# Altium PCB MicArrayPCBBoard_V3.PcbDoc (part 1 of 2)
Units mm, origin at the board's own origin, x right, y up, seen from the top; angles counter-clockwise.
Board outline 272 x 42 mm, 4 copper layers (Top Layer (ANLG1), Mid-Layer1 (GND), Mid-Layer2 (DIG), Bottom Layer (ANLG2)); 140 components, 65 nets, 451 pads, 100 vias.
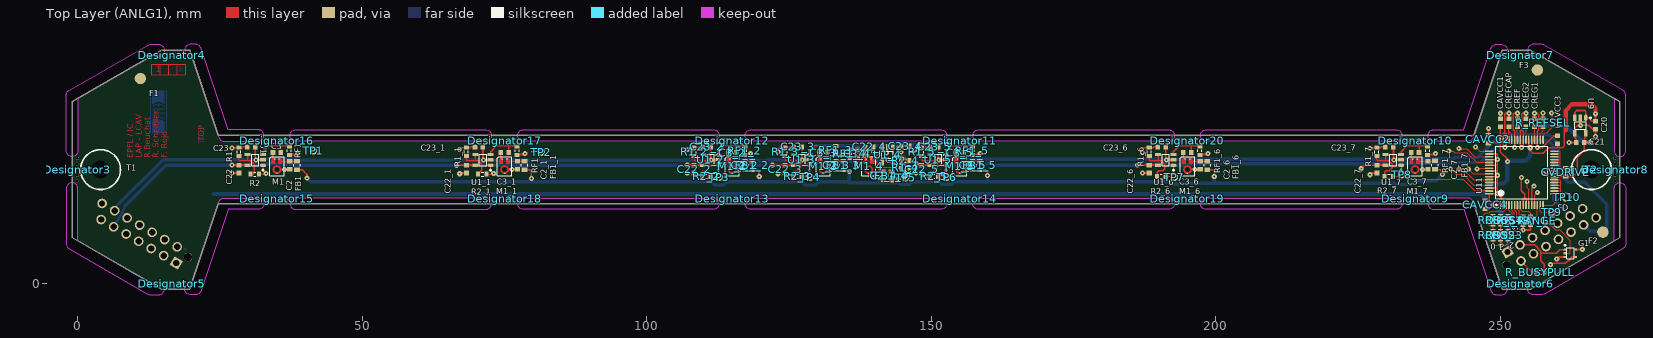
[diagram p0: Top Layer (ANLG1) view]
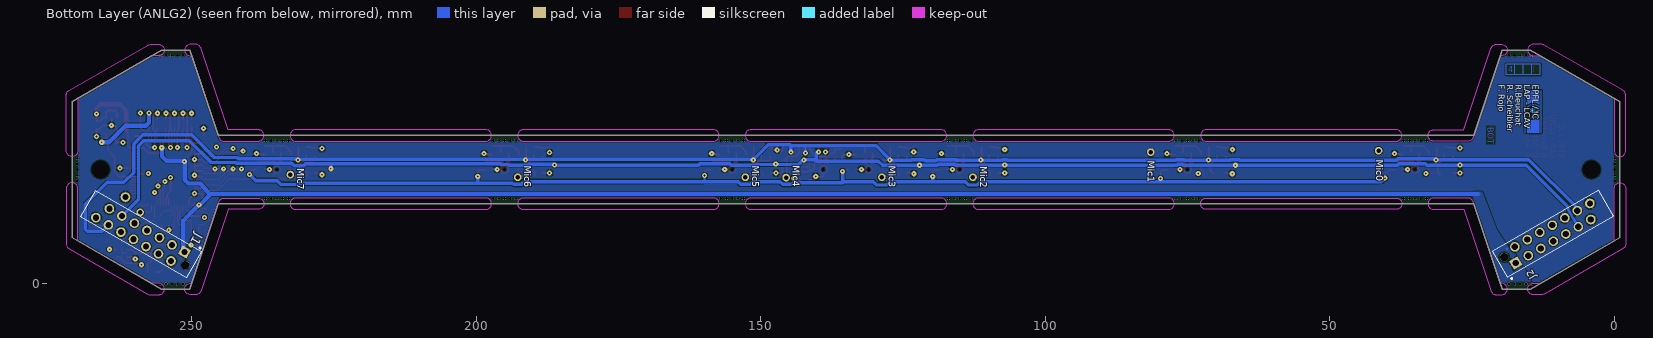
[diagram p1: Bottom Layer (ANLG2) view, seen from below]
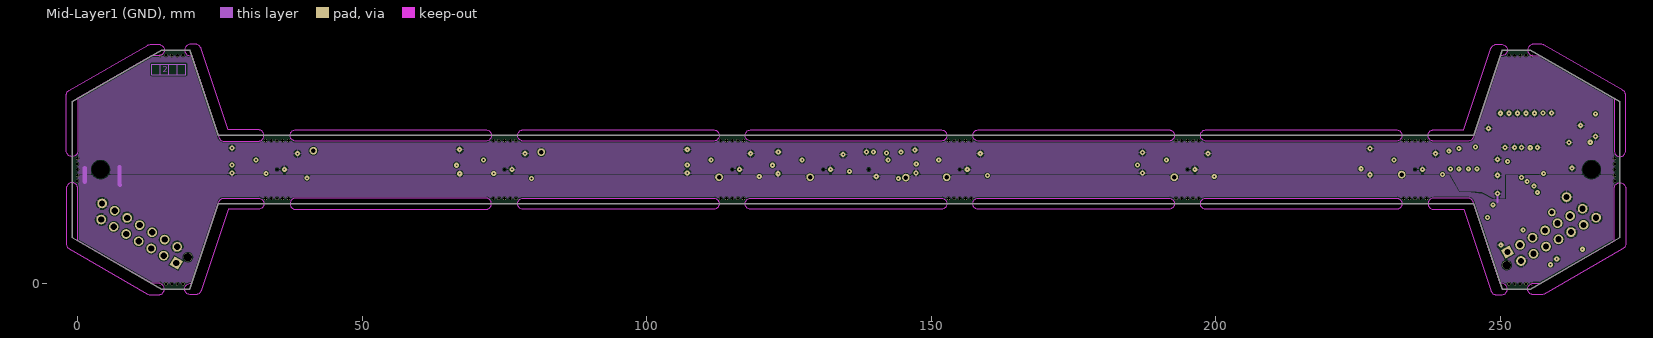
[diagram p2: Mid-Layer1 (GND)]
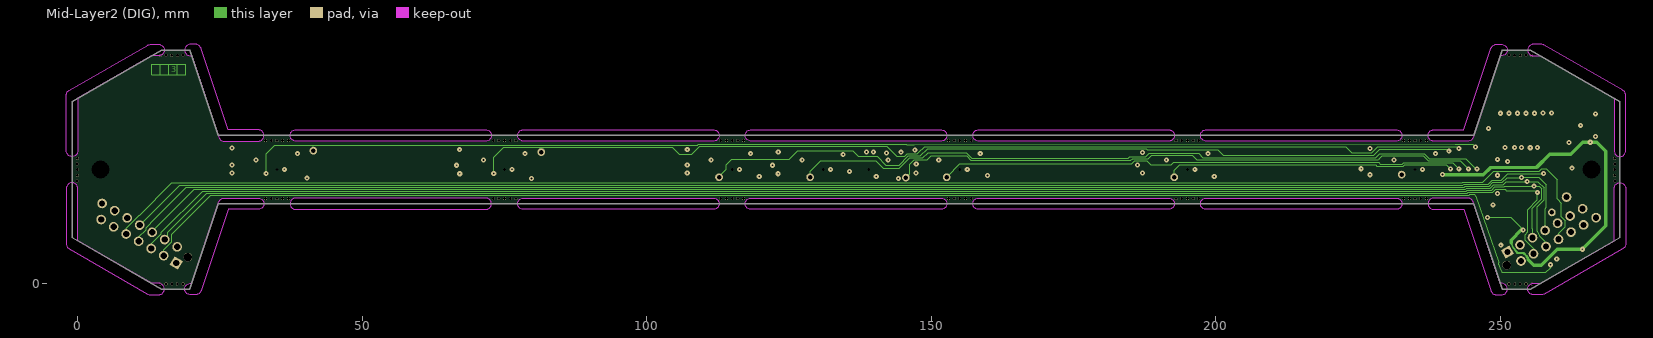
[diagram p3: Mid-Layer2 (DIG)]

## Layer stack, top to bottom
Top Solder: solder mask 0.0102, Solder Resist, Dk 3.5
Top Layer (ANLG1): signal copper 0.0356
Dielectric1: core 0.32, FR-4, Dk 4.8
Mid-Layer1 (GND): signal copper 0.0356
Dielectric2: prepreg 0.32, FR-4, Dk 4.8
Mid-Layer2 (DIG): signal copper 0.0356
Dielectric3: core 0.32, FR-4, Dk 4.8
Bottom Layer (ANLG2): signal copper 0.0356
Bottom Solder: solder mask 0.0102, Solder Resist, Dk 3.5

## Board outline
14.733,-1 -1,8.077 -1,31.923 14.733,41 19.667,41 24.667,26 245.333,26 250.333,41 255.277,41 271,31.923 271,8.077 255.277,-1 250.333,-1 245.333,14 24.667,14 19.667,-1
cut-out: 14.2,-2 ccw(c14.2,-1) 14.2,0 13.018,0 0,7.503 0,16.7 ccw(c-1,16.7) -2,16.7 -2,6.925 ccw(c-1,6.925) -1.5,6.058 12.25,-1.867 ccw(c12.75,-1) 12.75,-2
cut-out: 14.2,42 cw(c14.2,41) 14.2,40 13.018,40 0,32.497 0,23.3 cw(c-1,23.3) -2,23.3 -2,33.075 cw(c-1,33.075) -1.5,33.942 12.25,41.867 cw(c12.75,41) 12.75,42
cut-out: 255.8,42 ccw(c255.8,41) 255.8,40 256.982,40 270,32.497 270,23.3 ccw(c271,23.3) 272,23.3 272,33.075 ccw(c271,33.075) 271.5,33.942 257.75,41.867 ccw(c257.25,41) 257.25,42
cut-out: 255.8,-2 cw(c255.8,-1) 255.8,0 256.982,0 270,7.503 270,16.7 cw(c271,16.7) 272,16.7 272,6.925 cw(c271,6.925) 271.5,6.058 257.75,-1.867 cw(c257.25,-1) 257.25,-2
cut-out: 250.2,-2 ccw(c250.2,-1) 250.2,0 250.004,0 245.224,14.317 ccw(c244.275,14) 244.275,15 238.3,15 ccw(c238.3,14) 237.3,14 ccw(c238.3,14) 238.3,13 243.554,13 248.301,-1.217 ccw(c249.25,-0.9) 248.382,-1.397 ccw(c249.3,-1) 249.3,-2
cut-out: 250.2,42 cw(c250.2,41) 250.2,40 250.004,40 245.224,25.683 cw(c244.275,26) 244.275,25 238.3,25 cw(c238.3,26) 237.3,26 cw(c238.3,26) 238.3,27 243.554,27 248.301,41.217 cw(c249.25,40.9) 248.382,41.397 cw(c249.3,41) 249.3,42
cut-out: 19.8,42 ccw(c19.8,41) 19.8,40 19.996,40 24.776,25.683 ccw(c25.725,26) 25.725,25 31.7,25 ccw(c31.7,26) 32.7,26 ccw(c31.7,26) 31.7,27 26.446,27 21.699,41.217 ccw(c20.75,40.9) 21.618,41.397 ccw(c20.7,41) 20.7,42
cut-out: 19.8,-2 cw(c19.8,-1) 19.8,0 19.996,0 24.776,14.317 cw(c25.725,14) 25.725,15 31.7,15 cw(c31.7,14) 32.7,14 cw(c31.7,14) 31.7,13 26.446,13 21.699,-1.217 cw(c20.75,-0.9) 21.618,-1.397 cw(c20.7,-1) 20.7,-2
cut-out: 38.3,25 cw(c38.3,26) 38.3,27 71.7,27 cw(c71.7,26) 72.701,26 cw(c71.7,26) 71.7,25
cut-out: 78.3,25 cw(c78.3,26) 78.3,27 111.7,27 cw(c111.7,26) 112.701,26 cw(c111.7,26) 111.7,25
cut-out: 78.3,13 cw(c78.3,14) 78.3,15 111.7,15 cw(c111.7,14) 112.701,14 cw(c111.7,14) 111.7,13
cut-out: 118.3,13 cw(c118.3,14) 118.3,15 151.7,15 cw(c151.7,14) 152.701,14 cw(c151.7,14) 151.7,13
cut-out: 118.3,25 cw(c118.3,26) 118.3,27 151.7,27 cw(c151.7,26) 152.701,26 cw(c151.7,26) 151.7,25
cut-out: 158.3,25 cw(c158.3,26) 158.3,27 191.7,27 cw(c191.7,26) 192.701,26 cw(c191.7,26) 191.7,25
cut-out: 158.3,13 cw(c158.3,14) 158.3,15 191.7,15 cw(c191.7,14) 192.701,14 cw(c191.7,14) 191.7,13
cut-out: 198.3,13 cw(c198.3,14) 198.3,15 231.7,15 cw(c231.7,14) 232.701,14 cw(c231.7,14) 231.7,13
cut-out: 38.3,13 71.7,13 ccw(c71.7,14) 72.7,14 ccw(c71.7,14) 71.7,15 38.3,15 ccw(c38.3,14)
cut-out: 198.3,24.999 cw(c198.3,26) 198.3,27 231.7,27 cw(c231.7,26) 232.7,26 cw(c231.7,26) 231.7,24.999

## Design rules (kind name [scope] priority, off if disabled: settings)
BoardOutlineClearance [All] p1: gap=0.25
Clearance Clearance_3 [InNamedPolygon('5V') Or  InNamedPolygon('5V') Or  InNamedPolygon('5V') Or  InNamedPolygon('5V') Or  InNamedPolygon('5V')] p1: gap=0.25
Clearance [All] p2: gap=0.15
ComponentClearance [All] p1: gap=0.2 collisioncheckmode=3 verticalgap=0.254 showdistances=FALSE
FabricationTestPointUsage TestPointUsage [All] p1: valid=0 allowmultiple=FALSE
FabricationTestpoint Testpoint [All] p1: side=3 testpointundercomponent=TRUE minsize=1.016 maxsize=2.54 preferedsize=1.524 minholesize=0 maxholesize=1.016 preferedholesize=0.813 testpointgrid=0.025 allowsidetop=TRUE allowsidebottom=TRUE usegrid=TRUE gridtolerance=0
HoleSize [All] p1: absolutevalues=TRUE maxlimit=3.5 minlimit=0.3 maxpercent=80.000 minpercent=20.000
HoleToHoleClearance [All] p1: gap=0.25 allowstackedmicrovias=TRUE
MinimumSolderMaskSliver [All] p1: minsoldermaskwidth=0.1
PasteMaskExpansion [All] p1: expansion=-0.05
PlaneConnect [All] p1: planeconnectstyle=Relief reliefexpansion=0.508 reliefentries=4 reliefconductorwidth=0.25 reliefairgap=0.25
PolygonConnect PolygonConnect_1 [All vs IsNamedPolygon('5V') Or  IsNamedPolygon('5V') Or  IsNamedPolygon('5V') Or  IsNamedPolygon('5V') Or  IsNamedPolygon('5V')] p1: connectstyle=Relief reliefconductorwidth=0.254 reliefentries=4 polygonreliefangle="90 Angle" airgapwidth=0.254
PolygonConnect [All] p2: connectstyle=Relief reliefconductorwidth=0.25 reliefentries=4 polygonreliefangle="90 Angle" airgapwidth=0.25
RoutingVias [All] p1: holewidth=0.3 width=0.9 viastyle="Through Hole" minholewidth=0.3 minwidth=0.9 maxholewidth=0.3 maxwidth=0.9
SilkToSilkClearance [All] p1: silktosilkclearance=0.15
SilkToSolderMaskClearance SilkscreenOverComponentPads [IsPad] p1: minsilkscreentomaskgap=0.15 clearancetoexposedcopper=TRUE
SolderMaskExpansion [All] p1: expansion=0.05
Width Width_Power [(InNet('-15V') OR InNet('3V3') OR InNet('5V') OR InNet('+15V') OR InNet('AGND'))] p1: maxlimit=0.8 minlimit=0.15 preferedwidth=0.8
Width [All] p2: maxlimit=0.3 minlimit=0.2 preferedwidth=0.2
20 further rules are at their usual default settings.

## Classes and differential pairs
component class MicArraySchem_V3: * C2 C2_1 C2_2 C2_3 C2_4 C2_5 C2_6 C2_7 C3 C3_1 C3_2 C3_3 C3_4 C3_5 C3_6 C3_7 C20 C21 C22 C22_1 C22_2 C22_3 C22_4 C22_5 C22_6 C22_7 C23 C23_1 C23_2 C23_3 C23_4 C23_5 C23_6 C23_7 CAVCC1 CAVCC2 CAVCC3 CAVCC4 CREF CREFCAP CREG1 CREG2 CVDRIVE D2 F1 F2 F3 FB1 FB1_1 FB1_2 FB1_3 FB1_4 FB1_5 FB1_6 FB1_7 G1 J1 J2 M1 M1_1 M1_2 M1_3 M1_4 M1_5 M1_6 M1_7 O1 R1 R1_1 R1_2 R1_3 R1_4 R1_5 R1_6 R1_7 R2 R2_1 R2_2 R2_3 R2_4 R2_5 R2_6 R2_7 R_BUSYPULL R_RANGE R_REFSEL R_STBY_L RF1 RF1_1 RF1_2 RF1_3 RF1_4 RF1_5 RF1_6 RF1_7 ROS1 ROS2 ROS3 ROS4 ROS5 ROS6 T1 T2 TP1 TP2 TP3 TP4 TP5 TP6 TP7 TP8 TP9 TP10 U1 U1_1 U1_2 U1_3 U1_4 U1_5 U1_6 U1_7 U9 U11

## Components (designator, comment, footprint, x,y, rotation, side; value= is the part's Value field where it differs from the comment)
* "EPFL_LOGO" EPFL_LOGO 14.2,30.1 r270 bottom
C2 "100nF" 1608[0603] 37.25,20.75 r90 top
C2_1 "100nF" 1608[0603] 77.25,20.75 r90 top
C2_2 "100nF" 1608[0603] 117.25,20.75 r90 top
C2_3 "100nF" 1608[0603] 133.25,20.75 r90 top
C2_4 "100nF" 1608[0603] 141.6,18.895 r90 top
C2_5 "100nF" 1608[0603] 157.25,20.75 r90 top
C2_6 "100nF" 1608[0603] 197.25,20.75 r90 top
C2_7 "100nF" 1608[0603] 237.25,20.75 r90 top
C3 "1uF" 1608[0603] 35,23 r0 top
C3_1 "1uF" 1608[0603] 75,23 r0 top
C3_2 "1uF" 1608[0603] 115,23 r0 top
C3_3 "1uF" 1608[0603] 131,23 r0 top
C3_4 "1uF" 1608[0603] 137,22.8 r90 top
C3_5 "1uF" 1608[0603] 155,23 r0 top
C3_6 "1uF" 1608[0603] 195,23 r0 top
C3_7 "1uF" 1608[0603] 235,23 r0 top
C20 "1uF" 1608[0603] 266.7,27.8 r90 top
C21 "1uF" 1608[0603] 264.05,24.75 r0 top
C22 "Cap Semi" 1608[0603] 28.3,20.1 r270 top
C22_1 "Cap Semi" 1608[0603] 68.3,20.1 r270 top
C22_2 "Cap Semi" 1608[0603] 108.3,20.1 r270 top
C22_3 "Cap Semi" 1608[0603] 124.3,20.1 r270 top
C22_4 "Cap Semi" 1608[0603] 139.1,24 r180 top
C22_5 "Cap Semi" 1608[0603] 148.3,20.1 r270 top
C22_6 "Cap Semi" 1608[0603] 188.3,20.1 r270 top
C22_7 "Cap Semi" 1608[0603] 228.3,20.1 r270 top
C23 "Cap Semi" 1608[0603] 30.5,24 r0 top
C23_1 "Cap Semi" 1608[0603] 70.5,24 r0 top
C23_2 "Cap Semi" 1608[0603] 110.5,24 r0 top
C23_3 "Cap Semi" 1608[0603] 126.5,24 r0 top
C23_4 "Cap Semi" 1608[0603] 145.4,24.1 r180 top
C23_5 "Cap Semi" 1608[0603] 150.5,24 r0 top
C23_6 "Cap Semi" 1608[0603] 190.5,24 r0 top
C23_7 "Cap Semi" 1608[0603] 230.5,24 r0 top
CAVCC1 "100nF" 1608[0603] 250,28.2 r270 top
CAVCC2 "100nF" 1608[0603] 247.875,25.375 r270 top
CAVCC3 "100nF" 1608[0603] 260.05,25.225 r270 top
CAVCC4 "100nF" 1608[0603] 247.325,13.825 r270 top
CREF "10uF" 1608[0603] 253,28.2 r270 top
CREFCAP "10uF" 1608[0603] 251.5,28.2 r270 top
CREG1 "1uF" 1608[0603] 256,28.2 r270 top
CREG2 "1uF" 1608[0603] 254.5,28.2 r270 top
CVDRIVE "100nF" 1608[0603] 261.475,19.525 r90 top
Designator3 "Comment" CUTTING 0,20 r180 top
Designator4 "Comment" CUTTING 16.5,40 r90 top
Designator5 "Comment" CUTTING 16.5,0 r270 top
Designator6 "Comment" CUTTING 253.5,0 r270 top
Designator7 "Comment" CUTTING 253.5,40 r90 top
Designator8 "Comment" CUTTING 270,20 r0 top
Designator9 "Comment" CUTTING 235,15 r270 top
Designator10 "Comment" CUTTING 235,25 r90 top
Designator11 "Comment" CUTTING 155,25 r90 top
Designator12 "Comment" CUTTING 115,25 r90 top
Designator13 "Comment" CUTTING 115,15 r270 top
Designator14 "Comment" CUTTING 155,15 r270 top
Designator15 "Comment" CUTTING 35,15 r270 top
Designator16 "Comment" CUTTING 35,25 r90 top
Designator17 "Comment" CUTTING 75,25 r90 top
Designator18 "Comment" CUTTING 75,15 r270 top
Designator19 "Comment" CUTTING 195,15 r270 top
Designator20 "Comment" CUTTING 195,25 r90 top
F1 "*" Fiducial_round_2mm 11,36 r0 top
F2 "*" Fiducial_round_2mm 268,9 r0 top
F3 "*" Fiducial_round_2mm 256.5,37.5 r0 top
FB1 "Ferrite Bead" L_0603 38.525,20.75 r270 top
FB1_1 "Ferrite Bead" L_0603 78.5,20.75 r270 top
FB1_2 "Ferrite Bead" L_0603 118.5,20.75 r270 top
FB1_3 "Ferrite Bead" L_0603 134.5,20.75 r270 top
FB1_4 "Ferrite Bead" L_0603 143,18.9 r270 top
FB1_5 "Ferrite Bead" L_0603 158.5,20.75 r270 top
FB1_6 "Ferrite Bead" L_0603 198.5,20.75 r270 top
FB1_7 "Ferrite Bead" L_0603 238.5,20.775 r270 top
G1 "OR2" SOT65P210X110-5N 262.3,5.3 r0 top
J1 "Connector_MM14" "MM14 _TH_FEMALE" 251.25,5.5 r30 bottom locked
J2 "Connector_MM14" "MM14 _TH_FEMALE" 17.3,3.6 r150 bottom
M1 "Mic" INMP504#1 35,20.595 r0 top
M1_1 "Mic" INMP504#1 75,20.595 r0 top
M1_2 "Mic" INMP504#1 115,20.595 r0 top
M1_3 "Mic" INMP504#1 131,20.595 r0 top
M1_4 "Mic" INMP504#2 139,20.595 r0 top
M1_5 "Mic" INMP504#1 155,20.595 r0 top
M1_6 "Mic" INMP504#1 195,20.595 r0 top
M1_7 "Mic" INMP504#1 235,20.595 r0 top
R1 "100" J1-0603 28.3,23.1 r270 top
R1_1 "100" J1-0603 68.3,23.1 r270 top
R1_2 "100" J1-0603 108.3,23.1 r270 top
R1_3 "100" J1-0603 124.3,23.1 r270 top
R1_4 "100" J1-0603 145.4,20.3 r180 top
R1_5 "100" J1-0603 148.3,23.1 r270 top
R1_6 "100" J1-0603 188.3,23.1 r270 top
R1_7 "100" J1-0603 228.3,23.1 r270 top
R2 "2.7k" J1-0603 31.1,19.2 r0 top
R2_1 "2.7k" J1-0603 71.1,19.2 r0 top
R2_2 "2.7k" J1-0603 110.404,18.796 r0 top
R2_3 "2.7k" J1-0603 126.404,18.796 r0 top
R2_4 "2.7k" J1-0603 145.4,21.6 r0 top
R2_5 "2.7k" J1-0603 150.404,18.796 r0 top
R2_6 "2.7k" J1-0603 190.404,18.796 r0 top
R2_7 "2.7k" J1-0603 230.404,18.796 r0 top
R_BUSYPULL "10K" J1-0603 257,2 r0 top
R_RANGE "10K" J1-0603 255.3,11.05 r270 top
R_REFSEL "10K" J1-0603 257.5,28.2 r270 top
R_STBY_L "10K" J1-0603 254,11.05 r270 top
RF1 "10K" J1-0603 37.2,23.3 r90 top
RF1_1 "10K" J1-0603 77.2,23.3 r90 top
RF1_2 "10K" J1-0603 117.2,23.3 r90 top
RF1_3 "10K" J1-0603 133.2,23.4 r90 top
RF1_4 "10K" J1-0603 135.7,22.795 r90 top
RF1_5 "10K" J1-0603 157.2,23.3 r90 top
RF1_6 "10K" J1-0603 197.2,23.3 r90 top
RF1_7 "10K" J1-0603 237.2,23.3 r90 top
ROS1 "10K" J1-0603 248.725,8.5 r270 top
ROS2 "10K" J1-0603 250.025,8.5 r270 top
ROS3 "10K" J1-0603 251.325,8.5 r270 top
ROS4 "10K" J1-0603 251.35,11.1 r270 top
ROS5 "10K" J1-0603 250.025,11.1 r270 top
ROS6 "10K" J1-0603 248.725,11.1 r270 top
T1 "Mounting Hole (M3)" M3MOUNTINGHOLE 4,20 r0 top
T2 "Mounting Hole (M3)" M3MOUNTINGHOLE 266,20 r0 top
TP1 "TP" TP_0.75mm 41.4,23.325 r90 top
TP2 "TP" TP_0.75mm 81.45,23.075 r90 top
TP3 "TP" TP_0.75mm 112.691,18.666 r90 top
TP4 "TP" TP_0.75mm 128.691,18.666 r90 top
TP5 "TP" TP_0.75mm 145.525,18.6 r90 top
TP6 "TP" TP_0.75mm 152.691,18.666 r90 top
TP7 "TP" TP_0.75mm 192.691,18.666 r90 top
TP8 "TP" TP_0.75mm 232.65,19.125 r90 top
TP9 "TP" TP_0.75mm 259.05,12.475 r90 top
TP10 "TP" TP_1mm 261.629,15.175 r90 top
U1 "OPA170AIDBVR" SOT95P280X145-5N 31.2,21.7 r180 top
U1_1 "OPA170AIDBVR" SOT95P280X145-5N 71.2,21.7 r180 top
U1_2 "OPA170AIDBVR" SOT95P280X145-5N 111.2,21.7 r180 top
U1_3 "OPA170AIDBVR" SOT95P280X145-5N 127.2,21.7 r180 top
U1_4 "OPA170AIDBVR" SOT95P280X145-5N 142.3,22.6 r270 top
U1_5 "OPA170AIDBVR" SOT95P280X145-5N 151.2,21.7 r180 top
U1_6 "OPA170AIDBVR" SOT95P280X145-5N 191.2,21.7 r180 top
U1_7 "OPA170AIDBVR" SOT95P280X145-5N 231.2,21.7 r180 top
U9 "LDO" SOT95P280X110-5N 264.05,27.75 r270 top
U11 "AD7606" TSQFP50P1200X1200X145-64N 253.75,19.5 r90 top

## Footprints (in the part's own frame and the unit in brackets; to place one, negate y for a bottom-side part, rotate by r counter-clockwise, add the part's x,y. Pads: shape width x height; smd on the part's side, far side on the other; paste and mask are expansions set on the pad)
1608[0603] [mm] "Chip Capacitor, Body 1.6x0.8mm, IPC High Density"
  rect 0.8x0.9 smd: 1(-0.7,0) 2(0.7,0)
  body extent -0.87,-0.48 0.87,0.48, height 1.3
CUTTING [mm]
  round 0.5 hole 0.5 unplated: 0(0.1,2) 0(0.1,1) 0(0.1,0) 0(0.1,-1) 0(0.1,-2)
EPFL_LOGO [mm]
  Top Layer (ANLG1) region: 1.4,0 1.4,1 3.585,0.995 3.585,-1.005 1.775,-1 1.775,-1 1.497,-0.534 1.4,0
  Top Layer (ANLG1) region: -3.725,-1 -1.471,-1 -1.803,-0.36 -1.803,0.36 -1.471,1 -1.471,1 -3.725,1
  Top Layer (ANLG1) lines w0.2: 3.6,1.4 -3.8,1.4 ; 0.9,1 0.9,0 ccw(c2.421,0) 1.275,-1 ; 0.525,1 ccw(c1.671,0) 0.15,0 ; -0.6,1 -0.6,-1 ; -0.975,1 ccw(c0.171,0) -0.975,-1 ; -0.362,0.996 cw(c-0.707,0.497) -0.365,-0.005 ; 0.525,0 0.15,0 ; -0.975,0 -1.35,0 ; 0.15,-1 0.15,0 ; 3.6,-1.4 -3.8,-1.4 ; 3.6,1 3.6,-1 1.775,-1 cw(c2.921,0) 1.4,0 1.4,1 3.6,1 ; -1.471,1 ccw(c-0.325,0) -1.471,-1 -3.8,-1 -3.8,1 -1.471,1
Fiducial_round_2mm [mm] "Fiducial 2mm round NOpastSolder"
  round 2 smd paste-1 mask+0.2: 1(0,0)
INMP504#1 [mm] "MicroPhone_INMP504"
  round 0.25 smd mask+0: 1(-0.415,1.245) 3(0.385,1.245)
  round 0.25 smd paste+0 mask+0: 2(0,-1.225)
  round 0 hole 0.5 unplated mask+0: ""(0,-0.595)
  Top Layer (ANLG1) circle w0.3: c0,-0.595 r0.625
  Top Layer (ANLG1) region: -0.965,1.175 -0.765,1.375 -0.285,1.375 -0.285,0.475 -0.965,0.475
  Top Layer (ANLG1) region: 0.935,1.175 0.735,1.375 0.255,1.375 0.255,0.475 0.935,0.475
  silkscreen extent -1.25,-1.68 1.25,1.68, body extent -1.25,-1.68 1.25,1.68, height 0.99
INMP504#2 [mm] "MicroPhone_INMP504"
  round 0.25 smd mask+0: 1(-0.415,1.245) 3(0.385,1.245)
  round 0.25 smd paste+0 mask+0: 2(0,-1.225)
  round 0 hole 0.5 unplated mask+0: ""(0,-0.595)
  Top Layer (ANLG1) region: 0.935,1.175 0.735,1.375 0.255,1.375 0.255,0.475 0.935,0.475
  Top Layer (ANLG1) region: -0.965,1.175 -0.765,1.375 -0.285,1.375 -0.285,0.475 -0.965,0.475
  Top Layer (ANLG1) lines w0.3: 0,-1.22 ccw(c0,-0.595) 0.625,-0.595 ccw(c0,-0.595) 0,-1.22
  silkscreen extent -1.25,-1.68 1.25,1.68, body extent -1.25,-1.68 1.25,1.68, height 0.99
J1-0603 [mm] "Chip Resistor, Body 1.6x0.8mm, IPC High Density"
  rect 0.7x0.9 smd: 1(-0.75,0) 2(0.75,0)
  silkscreen extent -0.2,-0.35 0.2,0.35, body extent -0.85,-0.48 0.85,0.48, height 0.9
L_0603 [mm]
  rect 0.8x1 smd: 1(-0.75,0) 2(0.75,0)
  silkscreen extent -0.18,-0.58 0.18,0.58, body extent -0.82,-0.43 0.82,0.43, height 0.85
M3MOUNTINGHOLE [mm]
  round 0 hole 3.2 unplated: 0(0,0)
  silkscreen extent -3.5,-3.5 3.5,3.5
"MM14 _TH_FEMALE" [mm] "Connector Micro-match 14pins female through Hole"
  round 1.5 hole 1.5 unplated: 0(-1.275,1.905)
  rect 1.7x1.7 hole 1.1: 1(0,0)
  round 1.7 hole 1.1: 2(1.27,2.54) 3(2.54,0) 4(3.81,2.54) 5(5.08,0) 6(6.35,2.54) 7(7.62,0) 8(8.89,2.54) 9(10.16,0) 10(11.43,2.54) 11(12.7,0) 12(13.97,2.54) 13(15.24,0) 14(16.51,2.54)
  silkscreen extent -2.5,-2.12 19,3.8, body extent -2.3,-1.3 18.86,3.73, height 7.2
SOT65P210X110-5N [mm] "SOT23, 5-Leads, Body 2.2x2.4mm (max), Pitch 0.65mm, IPC Medium Density"
  oval 0.5x0.4 smd: 1(-0.95,0.65)
  rect 0.5x0.4 smd: 2(-0.95,0) 3(-0.95,-0.65) 4(0.95,-0.65) 5(0.95,0.65)
  silkscreen extent -1.07,-1 0.63,1.52, body extent -0.67,-1.1 0.67,1.1, height 1.1
SOT95P280X110-5N [mm] "SOT23, 5-Leads, Body 3.0x3.0mm (max), Pitch 0.95mm, IPC Medium Density"
  oct 1.1x0.6 smd: 1(-1.35,0.95)
  rect 1.1x0.6 smd: 2(-1.35,0) 3(-1.35,-0.95) 4(1.35,-0.95) 5(1.35,0.95)
  silkscreen extent -1.47,-1 0.63,1.93, body extent -0.87,-1.52 0.87,1.53, height 1.1
SOT95P280X145-5N [mm] "SOT23, 5-Leads, Body 3.0x3.0mm (max), Pitch 0.95mm, IPC Medium Density"
  oval 1.05x0.6 smd: 1(-1.35,0.95)
  rect 1.05x0.6 smd: 2(-1.35,0) 3(-1.35,-0.95) 4(1.35,-0.95) 5(1.35,0.95)
  silkscreen extent -1.48,-1 0.63,1.92, body extent -0.87,-1.52 0.87,1.53, height 1.45
TP_0.75mm [mm] "Test Point d0.75mm hole"
  round 1.35 hole 0.8 paste+0: 1(0,0)
TP_1mm [mm] "Test Point d1mm hole"
  round 1.7 hole 1: 1(0,0)
TSQFP50P1200X1200X145-64N [mm] "TSQFP, 64-Leads, Body 10.00x10.00mm, Pitch 0.50mm, IPC Medium Density"
  rect 1.45x0.3 smd: 1(-5.725,3.75)
  oval 1.45x0.3 smd: 2(-5.725,3.25) 3(-5.725,2.75) 4(-5.725,2.25) 5(-5.725,1.75) 6(-5.725,1.25) 7(-5.725,0.75) 8(-5.725,0.25) 9(-5.725,-0.25) 10(-5.725,-0.75) 11(-5.725,-1.25) 12(-5.725,-1.75) 13(-5.725,-2.25) 14(-5.725,-2.75) 15(-5.725,-3.25) 16(-5.725,-3.75) 33(5.725,-3.75) 34(5.725,-3.25) 35(5.725,-2.75) 36(5.725,-2.25) 37(5.725,-1.75) 38(5.725,-1.25) 39(5.725,-0.75) 40(5.725,-0.25) 41(5.725,0.25) 42(5.725,0.75) 43(5.725,1.25) 44(5.725,1.75) 45(5.725,2.25) 46(5.725,2.75) 47(5.725,3.25) 48(5.725,3.75)
  oval 0.3x1.45 smd: 17(-3.75,-5.725) 18(-3.25,-5.725) 19(-2.75,-5.725) 20(-2.25,-5.725) 21(-1.75,-5.725) 22(-1.25,-5.725) 23(-0.75,-5.725) 24(-0.25,-5.725) 25(0.25,-5.725) 26(0.75,-5.725) 27(1.25,-5.725) 28(1.75,-5.725) 29(2.25,-5.725) 30(2.75,-5.725) 31(3.25,-5.725) 32(3.75,-5.725) 49(3.75,5.725) 50(3.25,5.725) 51(2.75,5.725) 52(2.25,5.725) 53(1.75,5.725) 54(1.25,5.725) 55(0.75,5.725) 56(0.25,5.725) 57(-0.25,5.725) 58(-0.75,5.725) 59(-1.25,5.725) 60(-1.75,5.725) 61(-2.25,5.725) 62(-2.75,5.725) 63(-3.25,5.725) 64(-3.75,5.725)
  silkscreen extent -5.85,-4.6 4.6,4.6, body extent -5,-5 5,5, height 1.45

## Part data
C2 C2_1 C2_2 C2_3 C2_4 C2_5 C2_6 C2_7 C3 C3_1 C3_2 C3_3 C3_4 C3_5 C3_6 C3_7 C20 C21 CAVCC1 CAVCC2 CAVCC3 CAVCC4 CREF CREFCAP CREG1 CREG2 CVDRIVE: library part "Cap Semi", "Capacitor (Semiconductor SIM Model)"
C22 C22_1 C22_2 C22_3 C22_4 C22_5 C22_6 C22_7 C23 C23_1 C23_2 C23_3 C23_4 C23_5 C23_6 C23_7: "Capacitor (Semiconductor SIM Model)"
F1 F2 F3: library part Reference
FB1 FB1_1 FB1_2 FB1_3 FB1_4 FB1_5 FB1_6 FB1_7: "Ferrite bead."
G1: "TinyOR2"
M1 M1_1 M1_2 M1_3 M1_4 M1_5 M1_6 M1_7: "INMP504"
R1 R1_1 R1_2 R1_3 R1_4 R1_5 R1_6 R1_7 R2 R2_1 R2_2 R2_3 R2_4 R2_5 R2_6 R2_7 R_BUSYPULL R_RANGE R_REFSEL R_STBY_L RF1 RF1_1 RF1_2 RF1_3 RF1_4 RF1_5 RF1_6 RF1_7 ROS1 ROS2 ROS3 ROS4 ROS5 ROS6: library part Res3, "Resistor"
U1 U1_1 U1_2 U1_3 U1_4 U1_5 U1_6 U1_7: library part OPA170, "OPA170"
U9: "TPS780330220DDCR"

## Via types
v1: diameter 0.9, hole 0.3, Top Layer (ANLG1) to Bottom Layer (ANLG2), tented both sides, 100 vias

## Nets (pads, with @x,y where several pads share a name; then routed paths per layer and width w, separated by ;. In a path a pad name is that pad's centre, name@x,y a point inside that pad or via, vN(x,y) a via of type N, cw(c..) or ccw(c..) an arc to the next point about the centre after c; other vN are vias at no path point)
3V3: C21.2 CVDRIVE.1 FB1.2 FB1_1.2 FB1_2.2 FB1_3.2 FB1_4.2 FB1_5.2 FB1_6.2 FB1_7.2 G1.5 R_RANGE.2 R_REFSEL.1 R_STBY_L.2 ROS4.1 ROS5.1 ROS6.1 U9.5 U11.6 U11.23 | length 341
  Top Layer (ANLG1) w0.2: v1(247.725,11.6) 247.975,11.85 ROS6.1@248.725,11.85 ; U11.6@252.5,13.775 252.5,12.843 252.875,12.468 252.875,11.175 253.075,10.975 253.075,9.775 253.45,9.4 v1(254,9.4)
  Top Layer (ANLG1) w0.3: FB1.2@38.5,19.95 39.45,19.95 40.275,19.125 v1(40.275,18.5) ; FB1_1.2@78.5,19.95 79.45,19.95 79.7,19.7 v1@79.7,18.45 ; FB1_2.2@118.5,19.95 118.55,20 119.4,20 119.7,19.7 v1@119.7,18.85 ; FB1_3.2@134.5,19.95 v1@135.35,19.95 ; v1@135.35,19.945 v1@135.6,19.695 ; FB1_4.2@143,18.15 143.925,18.15 v1(144.2,18.425) ; FB1_5.2@158.5,19.95 159.45,19.95 159.8,19.6 159.8,19 v1(159.85,18.95) ; FB1_6.2@198.5,19.8 198.5,19.95 199.425,19.95 199.725,19.65 v1(199.725,18.775) ; FB1_7.2@238.5,19.95 239.45,19.95 239.8,19.6 239.8,19.175 v1(239.825,19.15) ; ROS6.1@248.725,11.85 ROS5.1@250.025,11.85 ROS4.1@251.35,11.85 ; R_STBY_L.2@254,10.3 v1(254,9.4) 255.3,9.4 R_RANGE.2@255.3,10.3 ; R_REFSEL.1@257.5,28.95 v1(257.5,29.95) ; U11.23@259.475,18.75 261.55,18.75 261.6,18.8 262.8,18.8 263.5,19.5 263.5,22.2 264.75,23.45 C21.2@264.75,24.75 ; G1.5@263.25,5.95 264.35,5.95 v1(264.4,6) ; U9.5@265,26.4 265,25.7 264.75,25.45 C21.2@264.75,24.75 ; v1(265.8,24.8) 264.8,24.8 C21.2@264.75,24.75
  Mid-Layer2 (DIG) w0.2: v1(247.725,11.6) 251.8,11.6 v1(254,9.4)
  Mid-Layer2 (DIG) w0.3: 251.9,7.1 252.286,6.255 252.761,5.65
  Mid-Layer2 (DIG) w0.4: 252.761,5.65 252.961,5.45 252.961,5.35 254.05,5.35 254.62,4.78 254.62,4.708 254.82,4.508 254.82,4.25 254.92,4.15
  Mid-Layer2 (DIG) w0.6: v1(239.825,19.15) 239.875,19.1 247,19.1 248.275,20.375 256.35,20.375 258.675,22.7 262.4,22.7 264.5,24.8 v1(265.8,24.8) 266.95,24.8 268.55,23.2 268.55,10.15 v1(264.4,6) 260,6 257.2,3.2 255.87,3.2 254.92,4.15 ; 251.9,7.1 251.9,7.6 253.7,9.4 v1(254,9.4)
  Bottom Layer (ANLG2) w0.3: v1(144.2,18.425) 144.2,17.725 144.3,17.625 ; 159.85,17.9 v1(159.85,18.95)
  Bottom Layer (ANLG2) w0.6: v1(40.275,18.5) 40.925,17.85 41.175,17.85 78.5,17.85 111.35,17.85 111.9,17.3 113.525,17.3 114.075,17.85 119.775,17.85 ; 79.7,17.9 v1@79.7,18.45 ; v1(119.75,18.8) 119.75,17.875 119.775,17.85 ; v1(135.6,19.7) 135.6,17.85 ; 144.15,17.7 135.6,17.7 135.6,17.85 ; 144.3,17.625 144.525,17.4 146.15,17.4 146.65,17.9 146.95,17.9 151.375,17.883 151.833,17.425 153.525,17.425 153.971,17.871 154.525,17.871 159.8,17.85 ; 159.8,17.9 191.525,17.9 192.025,17.4 193.425,17.4 193.625,17.6 199.725,17.6 ; v1(199.725,18.775) 199.725,17.6 ; v1(239.825,19.15) 238.75,18.075 234.975,18.075 234.275,17.375 231.675,17.375 231.45,17.6 199.725,17.6 ; 119.775,17.85 127.175,17.85 127.725,17.3 129.675,17.3 130.225,17.85 134.5,17.85 135.6,17.85
  Bottom Layer (ANLG2) w0.75: v1(257.5,29.95) 257.5,28.25 258.05,27.7 261.6,27.7 264.5,24.8 v1(265.8,24.8)
  other v1: 79.725,18.45
5V: C20.2 CAVCC1.2 CAVCC2.2 CAVCC3.2 CAVCC4.2 J1.1 J2.1 U9.1 U9.3 U11.1 U11.37 U11.38 U11.48 | length 293.5
  Top Layer (ANLG1) w0.3: CAVCC4.2@247.325,13.125 248.05,13.125 248.7,13.775 U11.1@250,13.775 ; CAVCC2.2@247.875,24.675 249.95,24.675 U11.48@250,24.625 ; CAVCC1.2@250,27.5 U11.48@250,25.225 U11.48@250,24.625 ; v1@251.275,21.4 v1(251.275,21.425) 251.275,21.825 250,23.1 U11.48@250,24.625 ; U11.38@255,25.225 255,24 v1@255.25,24 ; U11.37@255.5,25.225 255.5,24 v1@255.25,24 ; CAVCC3.2@260.05,24.525 260.05,23.825 ; 261.5,26.9 261.2,26.6 261.2,24.15 260.875,23.825 260.05,23.825 ; U9.3@263.1,29.1 263.1,30.1 263.4,30.4 264.8,30.4 265,30.2 U9.1@265,29.1 265.5,29.1 266.1,28.5 C20.2@266.7,28.5 v1(266.7,29.8) ; v1@255.25,24 v1(255.25,23.85) 255.25,23.35 255.725,22.875 257.55,22.875 258.5,23.825 260.05,23.825
  Top Layer (ANLG1) w0.75: 261.5,26.9 261.5,30.4 262.6,31.5 266,31.5 266.7,30.8 v1(266.7,29.8)
  Bottom Layer (ANLG2) w0.3: v1@255.2,23.8 v1(255.25,23.85)
  Bottom Layer (ANLG2) w0.5: 18.85,6.047 18.85,6.075
  Bottom Layer (ANLG2) w0.75: 23.9,15.7 246.8,15.7 ; 251.22,20.6 251.225,20.6 ; J1.1@251.25,5.5 251.45,5.7 251.45,11.075 249.5,13.025 249.475,13.025 v1(248.7,13.8) 248.55,13.8 246.725,15.625 246.8,15.7 ; v1@255.2,23.8 255.2,22.3 254.475,21.575 251.225,21.575 251.225,20.6 ; 246.8,15.7 247.1,16 248.474,17.575 250.575,17.575 251.225,18.225 251.225,20.6
+15V: C22.1 C22_1.1 C22_2.1 C22_3.1 C22_4.1 C22_5.1 C22_6.1 C22_7.1 J1.11 J2.11 U1.5 U1_1.5 U1_2.5 U1_3.5 U1_4.5 U1_5.5 U1_6.5 U1_7.5 | length 303
  Top Layer (ANLG1) w0.3: v1(27.1,20.8) C22.1@28.3,20.8 29.8,20.8 U1.5@29.85,20.75 ; v1(66.575,20.775) 66.6,20.8 C22_1.1@68.3,20.8 69.8,20.8 U1_1.5@69.85,20.75 ; v1(107.1,20.8) C22_2.1@108.3,20.8 109.8,20.8 U1_2.5@109.85,20.75 ; v1@122.125,20.8 C22_3.1@124.3,20.8 125.8,20.8 U1_3.5@125.85,20.75 ; v1(139.8,23.1) C22_4.1@139.8,24 ; v1@142.555,21.345 143.25,21.345 U1_4.5@143.2,21.395 ; v1@147.3,20.795 C22_5.1@148.3,20.795 ; C22_5.1@148.3,20.8 149.8,20.8 U1_5.5@149.85,20.75 ; v1(186.225,20.8) C22_6.1@188.3,20.8 189.8,20.8 U1_6.5@189.85,20.75 ; v1(225.525,20.15) 226.15,20.775 228.275,20.775 C22_7.1@228.3,20.8 229.8,20.8 U1_7.5@229.85,20.75
  Bottom Layer (ANLG2) w0.4: 7.2,11.425 7.8,12.428
  Bottom Layer (ANLG2) w0.5: J2.11@6.301,9.95 7.2,11.425 ; 7.8,12.428 8.325,13.65
  Bottom Layer (ANLG2) w0.6: 8.228,13.553 8.325,13.65 15.475,20.8 v1(27.1,20.8) 27.15,20.75 32.95,20.75 33.2,21 37.871,21 38.071,20.8 75.777,20.8 75.927,20.95 76.673,20.95 76.823,20.8 v1(107.1,20.8) 107.15,20.75 111.694,20.75 111.744,20.8 115.777,20.8 115.927,20.95 118.772,20.95 118.972,20.75 128.55,20.75 129.3,21.5 140.2,21.5 ; v1@140.2,22.995 140.2,21.7 v1(142.4,21.7) 142.5,21.7 143.3,20.9 150.756,20.9 150.906,20.75 155.15,20.75 155.4,21 160.725,21 160.925,20.8 v1(186.225,20.8) 186.375,20.95 190.777,20.95 190.927,20.8 191.673,20.8 ; 191.744,20.8 194.3,20.8 194.4,20.9 195.6,20.9 195.7,21 225.5,21 ; v1(225.525,20.15) 225.5,20.175 225.5,21 ; J1.11@262.249,11.85 261.249,12.849 261.249,12.851 259.325,14.775 259.325,24.175 258.4,25.1 250.4,25.1 246.55,21.25 242.275,21.25 242.175,21.15 232.45,21.15 232,20.7 230.3,20.7 230,21 225.5,21
  other v1: 122.1,20.775 147.35,21
-15V: C23.2 C23_1.2 C23_2.2 C23_3.2 C23_4.2 C23_5.2 C23_6.2 C23_7.2 J1.12 J2.12 U1.2 U1_1.2 U1_2.2 U1_3.2 U1_4.2 U1_5.2 U1_6.2 U1_7.2 | length 318
  Top Layer (ANLG1) w0.3: C23.2@31.2,24 31.2,21.7 v1(31.3,21.7) U1.2@32.55,21.7 ; C23_1.2@71.2,24 71.2,21.7 v1(71.3,21.7) U1_1.2@72.55,21.7 ; C23_2.2@111.2,24 111.2,21.7 v1(111.3,21.7) U1_2.2@112.55,21.7 ; C23_3.2@127.2,24 127.2,21.7 v1(127.3,21.7) U1_3.2@128.55,21.7 ; v1(142.1,22.9) 142.3,23.1 U1_4.2@142.3,23.95 ; C23_5.2@151.2,24 151.2,21.7 v1(151.3,21.7) U1_5.2@152.55,21.7 ; C23_6.2@191.2,24 191.2,21.7 v1(191.3,21.7) U1_6.2@192.55,21.7 ; C23_7.2@231.2,24 231.2,21.7 v1(231.3,21.7) U1_7.2@232.55,21.7
  Top Layer (ANLG1) w0.6: v1(144.675,23.075) 144.7,23.1 C23_4.2@144.7,24.1
  Bottom Layer (ANLG2) w0.3: v1(142.1,22.9) 142.1,24.2
  Bottom Layer (ANLG2) w0.6: J2.12@6.422,12.685 6.6,12.863 6.6,13.35 15,21.75 31.25,21.75 v1(31.3,21.7) 31.5,21.9 38.031,21.9 38.256,21.675 65.85,21.675 65.875,21.7 67.473,21.7 67.498,21.675 75.592,21.675 75.617,21.7 76.983,21.7 77.008,21.675 106.702,21.675 106.727,21.7 107.473,21.7 107.498,21.675 115.592,21.675 115.617,21.7 119.082,21.7 119.207,21.575 121.1,21.575 121.225,21.7 123.473,21.7 123.498,21.675 127.175,21.675 129.7,24.2 142.1,24.2 144.675,24.2 ; v1(144.675,23.075) 144.675,24.2 ; v1(151.3,21.7) v1@151.2,21.8 ; v1@191.25,21.75 v1(191.3,21.7) ; v1@231.25,21.75 231.2,21.8 v1@151.2,21.8 ; v1(231.3,21.7) 231.5,21.9 239.898,21.9 ; 239.898,21.925 241.825,21.925 242.025,22.125 246.052,22.125 249.975,26.1 258.6,26.1 260.2,24.5 260.2,19.475 261.9,17.775 264.85,17.775 268.675,13.95 268.675,9.55 268.3,9.175 265.729,9.175 J1.12@264.618,10.285 ; 144.675,24.2 144.826,24.351 148.649,24.351 v1@151.2,21.8